# Altium PCB machIn.PcbDoc
Units mm, origin at the board's own origin, x right, y up, seen from the top; angles counter-clockwise.
Board outline 152.4 x 101.6 mm, 2 copper layers (Top Layer, Bottom Layer); 14 components, 14 nets, 71 pads, 0 vias.
Unrouted connection lines stored in the file: 2.
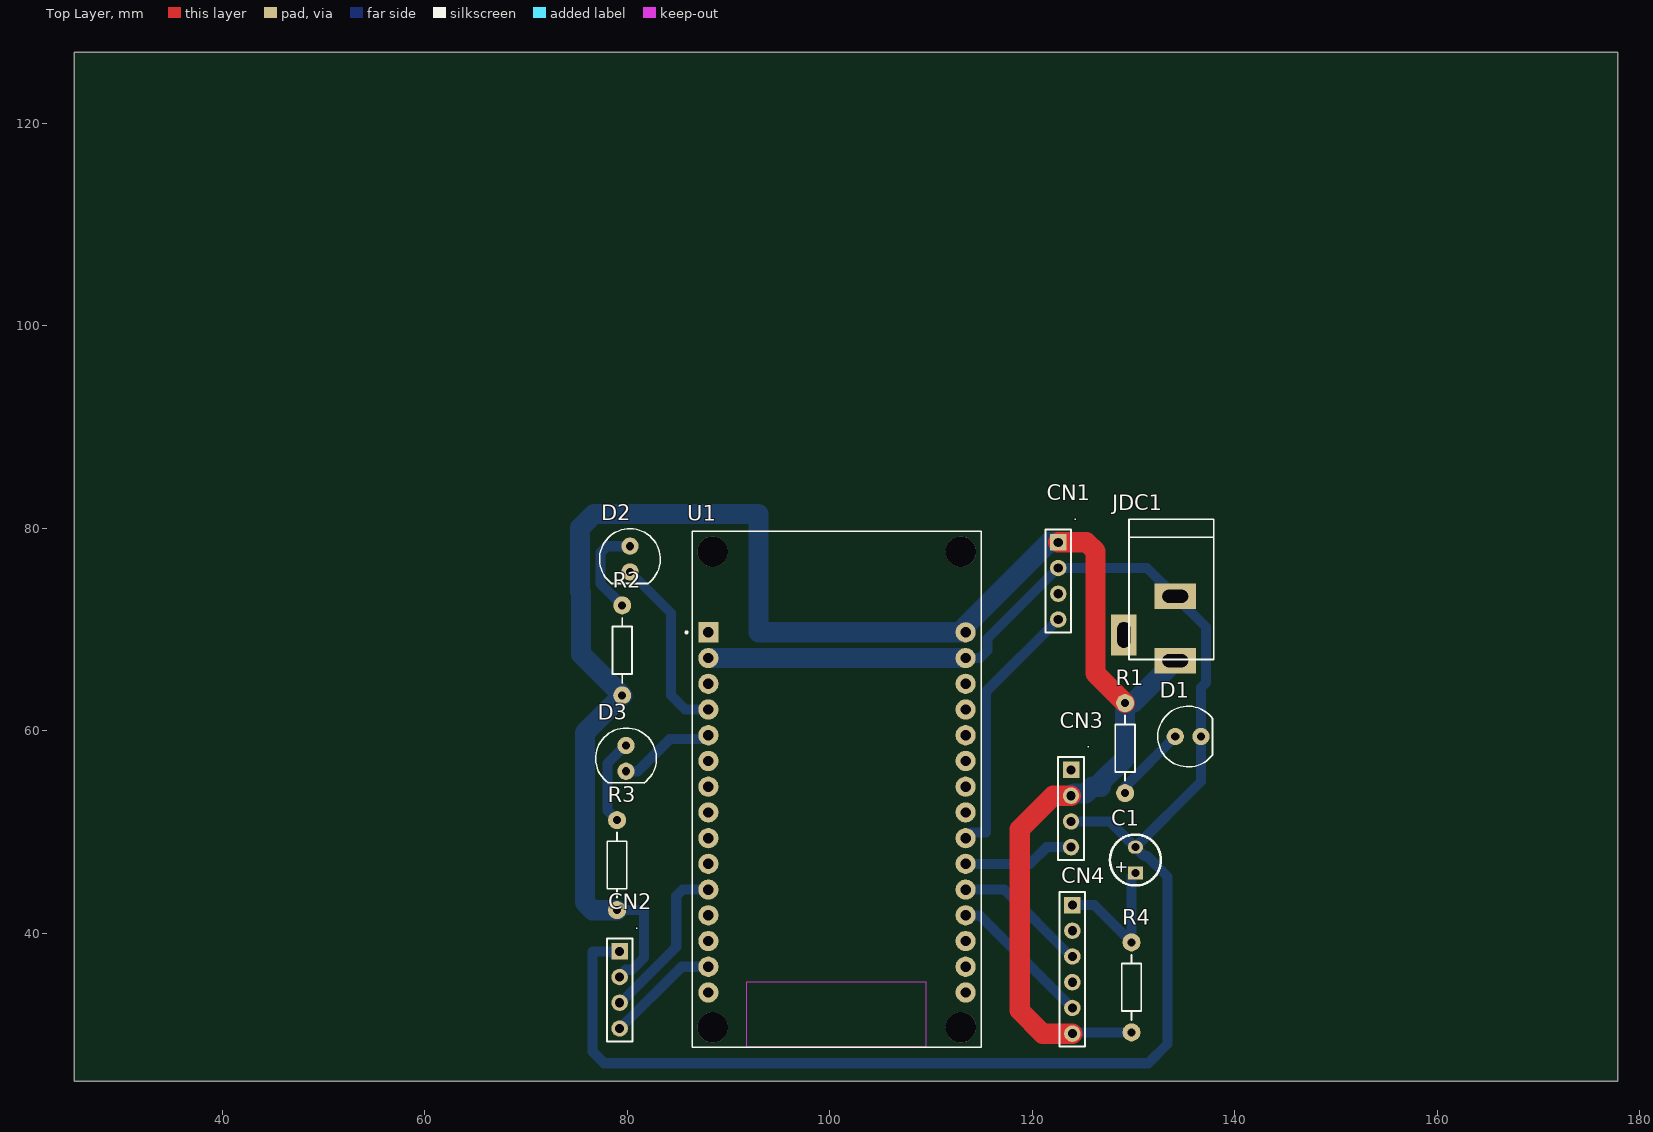
[diagram p0: Top Layer view]
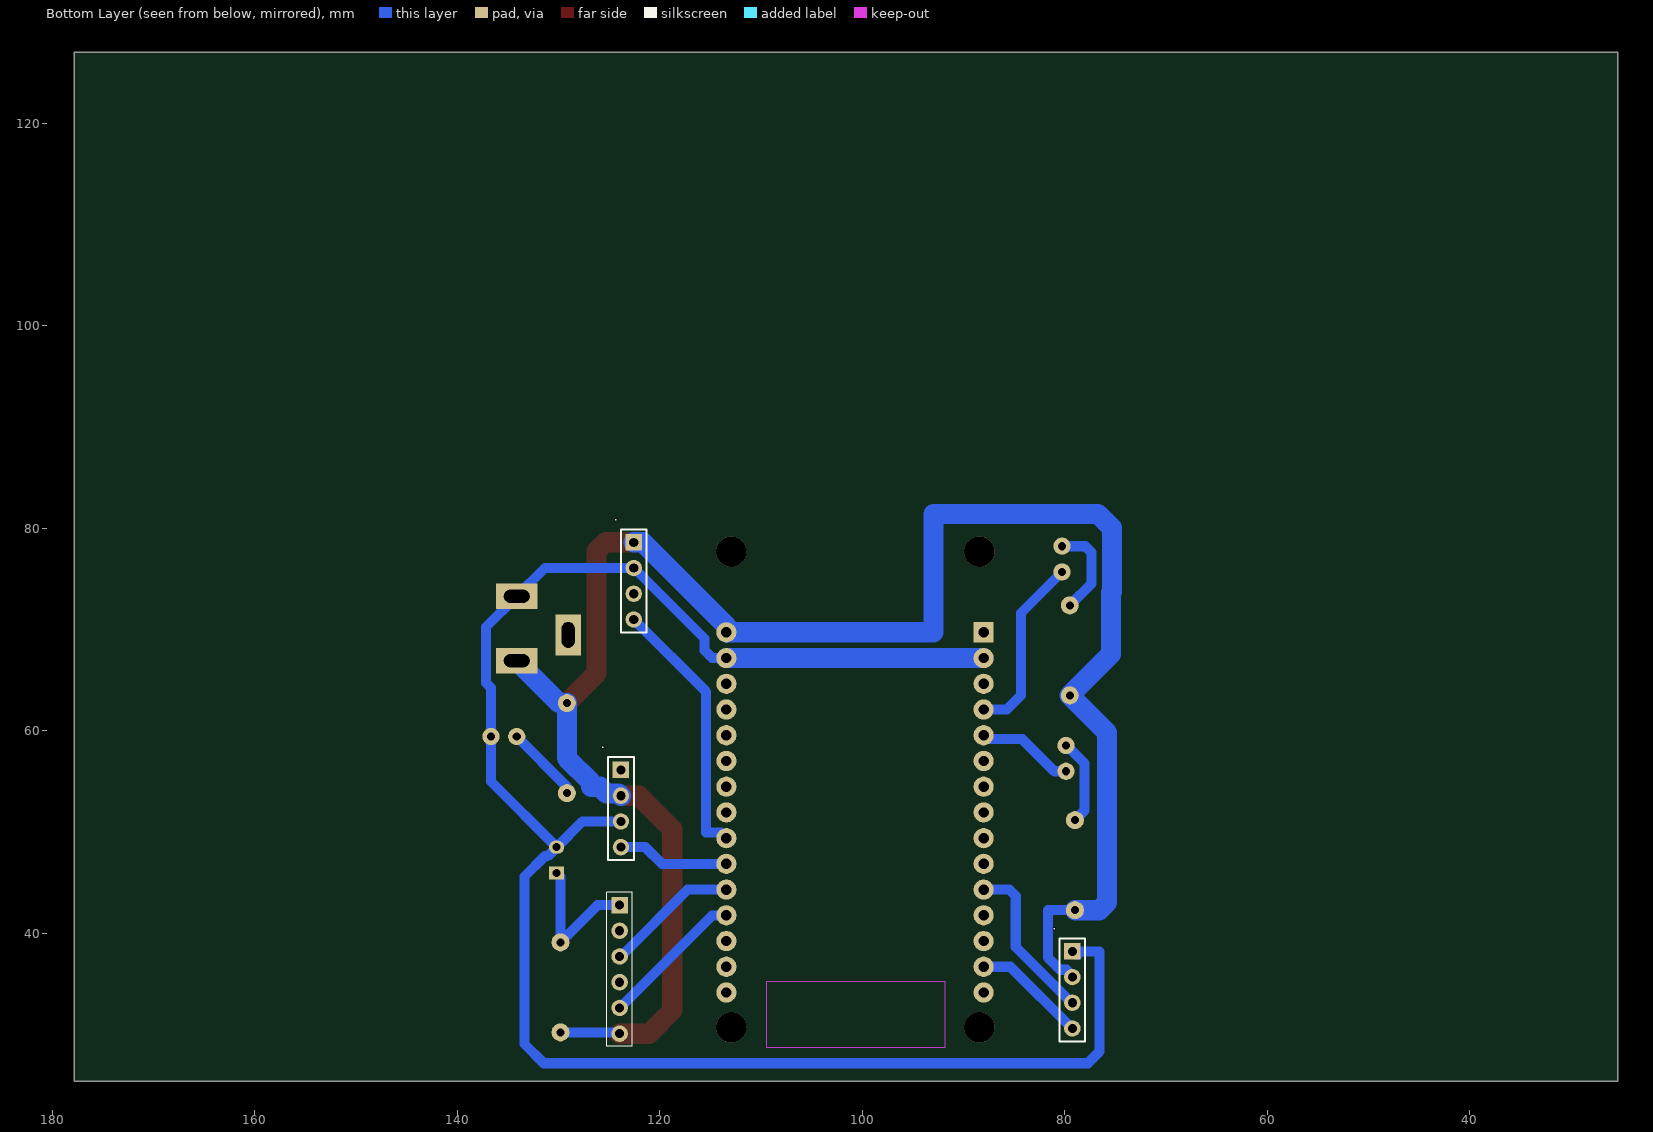
[diagram p1: Bottom Layer view, seen from below]
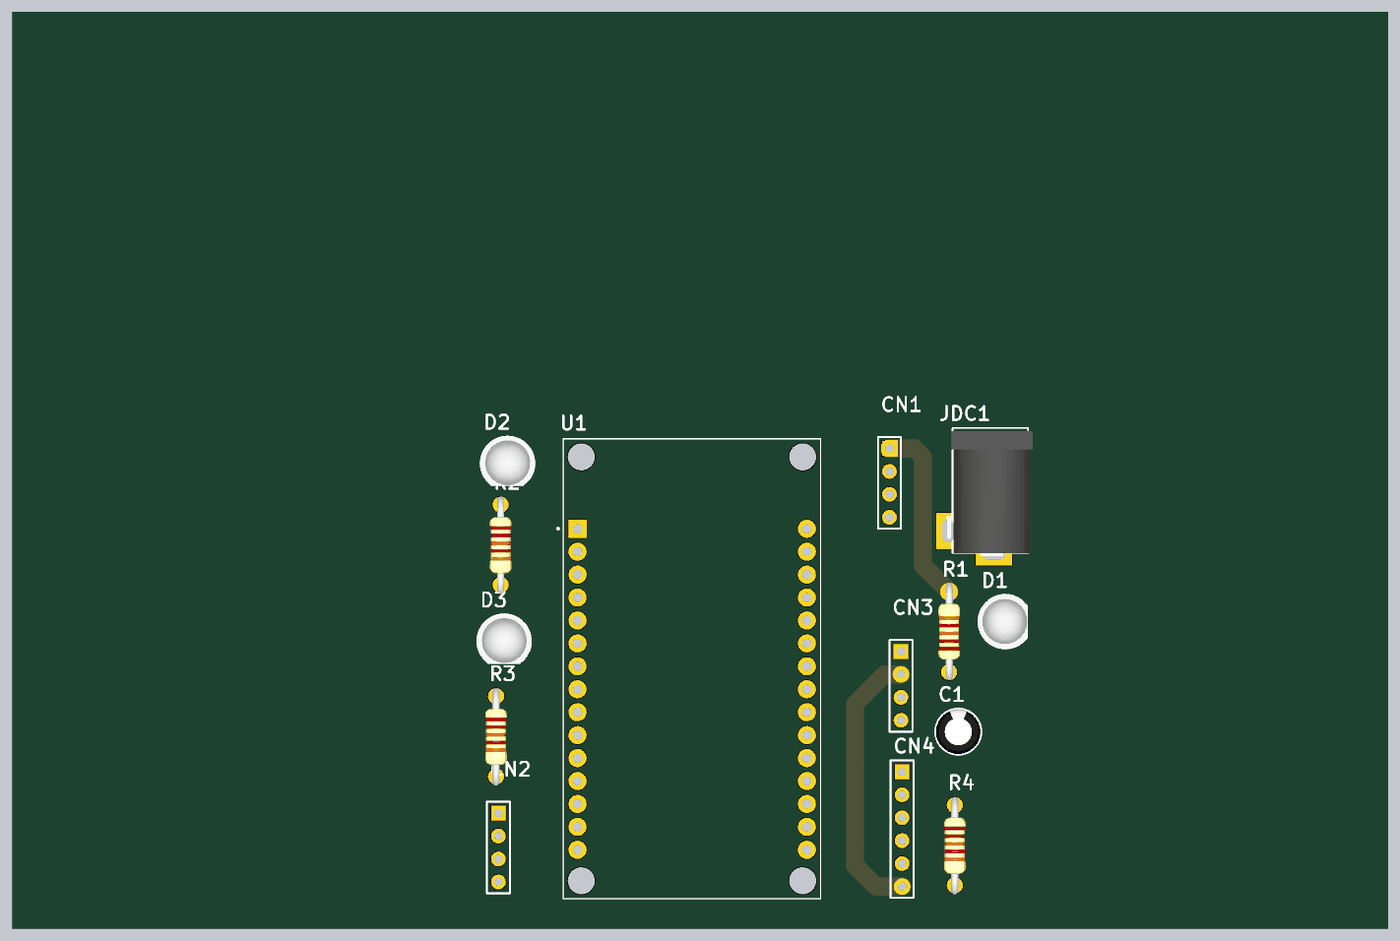
[diagram p2: 3D render of the assembled board from above, using the file's embedded part models]

## Layer stack, top to bottom
Top Solder: solder mask 0.0102, Solder Resist, Dk 3.5
Top Layer: signal copper 0.0356
Dielectric 1: dielectric 0.32, FR-4, Dk 4.8
Bottom Layer: signal copper 0.0356
Bottom Solder: solder mask 0.0102, Solder Resist, Dk 3.5

## Board outline
25.4,25.4 177.8,25.4 177.8,127 25.4,127

## Design rules (kind name [scope] priority, off if disabled: settings)
Clearance [All] p1: gap=0.5
PolygonConnect [All] p1: connectstyle=Relief reliefconductorwidth=0.254 reliefentries=4 polygonreliefangle="90 Angle" airgapwidth=0.254
RoutingVias [All] p1: holewidth=0.711 width=1.27 viastyle="Through Hole" minholewidth=0.711 minwidth=1.27 maxholewidth=0.711 maxwidth=1.27
SolderMaskExpansion [All] p1: expansion=0.102
Width [All] p1: maxlimit=3 minlimit=1 preferedwidth=2
30 further rules are at their usual default settings.

## Components (designator, comment, footprint, x,y, rotation, side; value= is the part's Value field where it differs from the comment)
C1 "Cap Pol 5mm" C5mm 130.175,47.244 r90 top
CN1 "IO" CON.HDR1X4 122.555,78.613 r270 top
CN2 "IO" CON.HDR1X4 79.248,38.227 r270 top
CN3 "IO" CON.HDR1X4 123.825,56.134 r270 top
CN4 "IO" CON.HDR1X6 123.952,42.799 r270 top
D1 "LED" "LED-0 5mm RED" 135.382,59.436 r90 top
D2 "LED" "LED-0 5mm RED" 80.264,76.962 r0 top
D3 "LED" "LED-0 5mm RED" 79.883,57.277 r0 top
JDC1 "Jac DC" DC-IN 131.572,70.104 r270 top
R1 "220" R1/4W 129.159,62.738 r270 top
R2 "220" R1/4W 79.502,63.5 r90 top
R3 "220" R1/4W 78.994,42.291 r90 top
R4 "220" R1/4W 129.794,30.226 r90 top
U1 "ESP32-DEVKIT-V1" MODULE_ESP32_DEVKIT_V1 100.711,54.208 r0 top

## Footprints (in the part's own frame and the unit in brackets; to place one, negate y for a bottom-side part, rotate by r counter-clockwise, add the part's x,y. Pads: shape width x height; smd on the part's side, far side on the other; paste and mask are expansions set on the pad)
C5mm [mm]
  rect 1.3x1.5 hole 0.8: 1(-1.27,0)
  oval 1.3x1.5 hole 0.8: 2(1.27,0)
  silkscreen extent -2.51,-2.51 2.51,2.51, body extent -2.5,-2.5 2.49,2.5, height 11.01
CON.HDR1X4 [mil]
  rect 64x64 hole 35.43: 1(0,0)
  round 64 hole 35.43: 2(100,0) 3(200,0) 4(300,0)
  silkscreen extent -50,-50 350,50, body extent -50,-50 350,50, height 350
CON.HDR1X6 [mil]
  rect 64x64 hole 35.43: 1(0,0)
  round 64 hole 35.43: 2(100,0) 3(200,0) 4(300,0) 5(400,0) 6(500,0)
  silkscreen extent -50,-50 550,50, body extent -50,-50 550,50, height 350
DC-IN [mil] "Jac DC input"
  rect 100x160 hole 50 slot 100 at 90 deg: 1(125,100) 2(-125,100)
  rect 160x100 hole 50 slot 100 at 0 deg: 3(25,-100)
  silkscreen extent -425,-80 120,250, body extent -410,-105 134,269, height 434
"LED-0 5mm RED" [mil] "Typical LED; RED; 2 Leads; Solder Pad 35mil"
  round 67 hole 32: 1(0,50) 2(0,-50)
  silkscreen extent -118,-96 118,118, body extent -118,-96 119,117, height 345
MODULE_ESP32_DEVKIT_V1 [mm]
  rect 2x2 hole 1.02: 1(-12.7,15.515)
  round 2 hole 1.02: 2(-12.7,12.975) 3(-12.7,10.435) 4(-12.7,7.895) 5(-12.7,5.355) 6(-12.7,2.815) 7(-12.7,0.275) 8(-12.7,-2.265) 9(-12.7,-4.805) 10(-12.7,-7.345) 11(-12.7,-9.885) 12(-12.7,-12.425) 13(-12.7,-14.965) 14(-12.7,-17.505) 15(-12.7,-20.045) 16(12.7,-20.045) 17(12.7,-17.505) 18(12.7,-14.965) 19(12.7,-12.425) 20(12.7,-9.885) 21(12.7,-7.345) 22(12.7,-4.805) 23(12.7,-2.265) 24(12.7,0.275) 25(12.7,2.815) 26(12.7,5.355) 27(12.7,7.895) 28(12.7,10.435) 29(12.7,12.975) 30(12.7,15.515)
  round 3 hole 3 unplated: ""(-12.28,-23.475) ""(-12.28,23.475) ""(12.23,-23.475) ""(12.23,23.475)
  Keep-Out Layer region: 8.78,-25.475 -8.91,-25.475 -8.91,-18.985 8.78,-18.985
  Keep-Out Layer region: 8.78,-25.475 -8.91,-25.475 -8.91,-18.985 8.78,-18.985
  Keep-Out Layer region: 8.78,-25.475 -8.91,-25.475 -8.91,-18.985 8.78,-18.985
  silkscreen extent -14.95,-25.48 14.23,25.48
R1/4W [mil] "R 1/4W, 2 Pin, 350mil"
  round 70 hole 31: 1(0,0) 2(350,0)
  silkscreen extent 48,-38 302,38, body extent -40,-47 386,47, height 111

## Part data
C1: "Polarized Capacitor (Axial)"
CN1 CN2 CN3: library part CON.HDR1x4, "Header 1x4"
CN4: library part CON.HDR1x6, "Header 1x6"
D1 D2 D3: "Typical LED"
JDC1: library part DCIN, "Jac DC input"
R1 R2 R3 R4: library part R1/4W, "Resistor 1/4W"
U1: "Dual core, Wi-Fi: 2.4 GHz up to 150 Mbits/s,BLE (Bluetooth Low Energy) and legacy Bluetooth, 32 bits, Up to 240 MHz"

## Nets (pads, with @x,y where several pads share a name; then routed paths per layer and width w, separated by ;. In a path a pad name is that pad's centre, name@x,y a point inside that pad or via, vN(x,y) a via of type N, cw(c..) or ccw(c..) an arc to the next point about the centre after c; other vN are vias at no path point)
GND: C1.2 CN1.2 CN2.1 CN3.3 CN4.2 CN4.4 D1.2 JDC1.2 U1.2 U1.29 | length 180.3
  Bottom Layer w1: CN2.1@78.627,37.914 78.935,37.914 CN2.1 76.581,38.227 76.581,28.321 77.724,27.178 131.445,27.178 133.35,29.083 133.35,45.613 131.339,47.624 131.065,47.624 C1.2 ; U1.29 114.808,67.183 115.57,67.945 115.57,69.112 122.531,76.073 CN1.2 131.318,76.073 JDC1.2 137.144,70.247 137.144,64.753 136.652,64.261 D1.2 136.652,54.991 C1.2 ; CN3.3@123.825,51.181 CN3.3 127.635,51.054 C1.2
  Bottom Layer w2: U1.2 U1.29
NetC1_1: C1.1 CN4.1 R4.2 | length 14.4
  Bottom Layer w1: CN4.1 126.111,42.799 R4.2 129.794,45.593 C1.1
NetCN1_4: CN1.4 U1.22 | length 26.2
  Bottom Layer w1: U1.22 113.951,49.943 115.411,49.943 115.411,63.849 CN1.4
NetCN2_3: CN2.3 U1.11 | length 16.3
  Bottom Layer w1: CN2.3 79.329,33.147 84.836,38.654 84.836,43.688 85.471,44.323 U1.11
NetCN2_4: CN2.4 U1.14 | length 11.3
  Bottom Layer w1: CN2.4 79.272,30.607 85.369,36.705 88.009,36.705 U1.14
NetCN3_4: CN3.4 U1.21 | length 11.1
  Bottom Layer w1: U1.21 119.761,46.863 121.412,48.514 CN3.4
NetCN4_3: CN4.3 U1.20 | length 13.3
  Bottom Layer w1: U1.20 117.221,44.323 123.825,37.719 CN4.3
NetCN4_5: CN4.5 U1.19 | length 14.3
  Bottom Layer w1: U1.19 114.808,41.783 114.808,41.759 123.928,32.639 CN4.5
NetD1_1: D1.1 R1.2 | length 7.6
  Bottom Layer w1: R1.2 129.159,54.483 D1.1
NetD2_1: D2.1 R2.2 | length 9.3
  Bottom Layer w1: R2.2 77.343,74.549 77.343,77.597 77.978,78.232 D2.1
NetD2_2: D2.2 U1.4 | length 18.1
  Bottom Layer w1: D2.2 84.328,71.628 84.328,63.5 85.725,62.103 U1.4
NetD3_1: D3.1 R3.2 | length 8.6
  Bottom Layer w1: R3.2 78.032,52.143 78.032,56.774 79.805,58.547 D3.1
NetD3_2: D3.2 U1.5 | length 9.6
  Bottom Layer w1: D3.2 81.026,56.007 84.201,59.182 87.63,59.182 U1.5
VCC: CN1.1 CN2.2 CN3.2 CN4.6 JDC1.1 R1.1 R2.1 R3.1 R4.1 U1.30 | length 194.3
  Top Layer w2: CN1.1 125.349,78.613 126.238,77.724 126.238,65.659 R1.1 ; CN3.2 122.047,53.594 118.745,50.292 118.745,32.385 121.031,30.099 CN4.6
  Bottom Layer w1: R3.1 81.661,42.291 81.661,37.6 80.475,36.414 79.848,36.414 79.248,35.814 CN2.2 ; CN3.2@123.444,53.213 CN3.2 ; CN4.6 124.079,30.226 R4.1
  Bottom Layer w2: R3.1 76.581,42.291 75.819,43.053 75.819,59.817 R2.1 75.438,67.564 75.438,73.626 75.343,73.721 75.343,80.042 76.708,81.407 92.964,81.407 92.964,69.723 U1.30 113.411,70.358 121.666,78.613 CN1.1 ; CN3.2 124.052,53.821 125.259,53.821 125.921,54.483 126.77,54.483 126.77,54.922 129.159,57.311 R1.1 129.921,62.738 JDC1.1
pads on no net: CN1.3 CN3.1 JDC1.3 U1. U1.1 U1.3 U1.6 U1.7 U1.8 U1.9 U1.10 U1.12 U1.13 U1.15 U1.16 U1.17 U1.18 U1.23 U1.24 U1.25 U1.26 U1.27 U1.28

## Text inside footprints (layer, text, board x,y; h text height)
C1: Top Overlay "+" at 129.337,45.847 h1.2 r90